# Altium PCB RAM.PcbDoc
Units mm, origin at the board's own origin, x right, y up, seen from the top; angles counter-clockwise.
Board outline 70 x 57.5 mm, 2 copper layers (Top Layer, Bottom Layer), stack 1.671 mm thick; 43 components, 61 nets, 194 pads, 62 vias.
Unrouted connection lines stored in the file: 4.
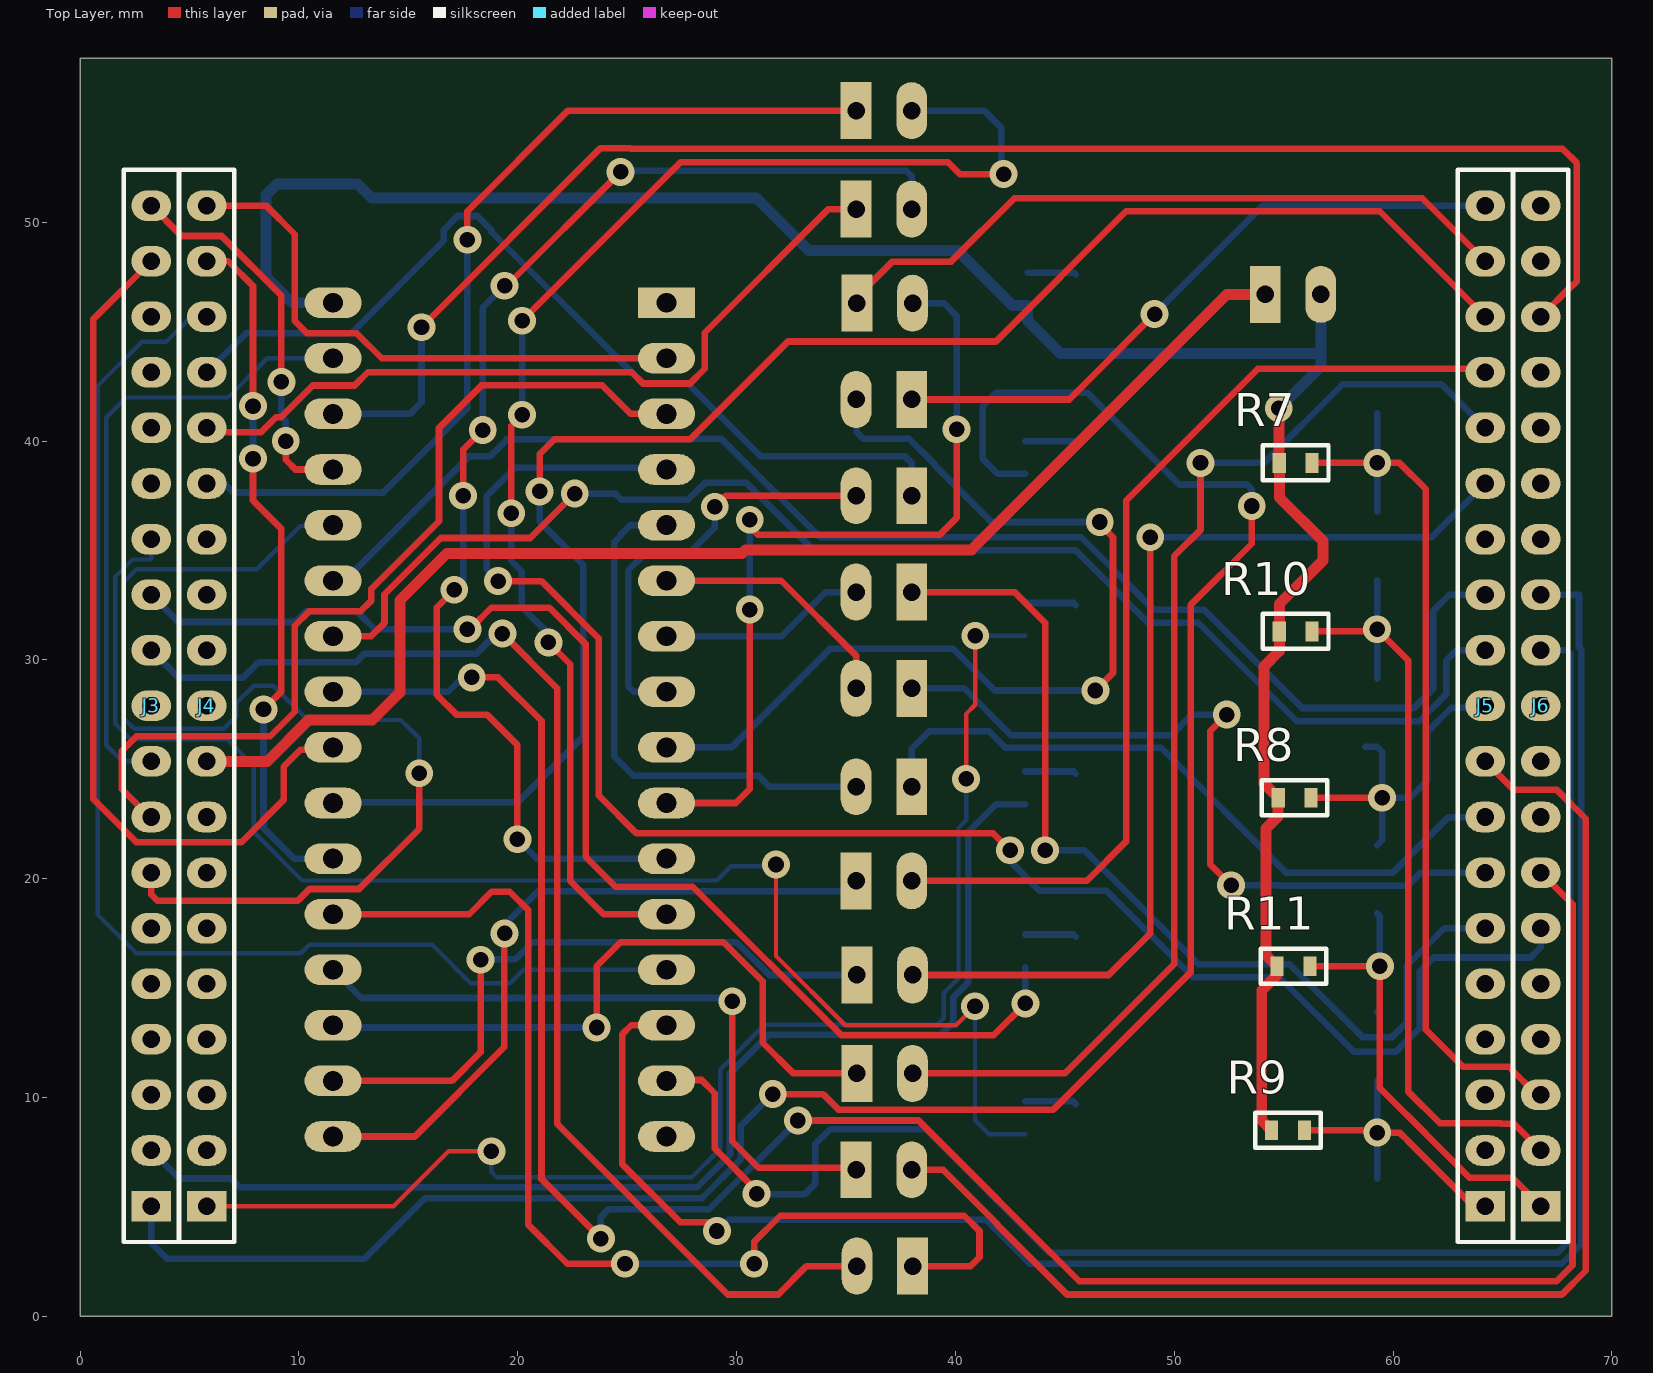
[diagram p0: Top Layer view]
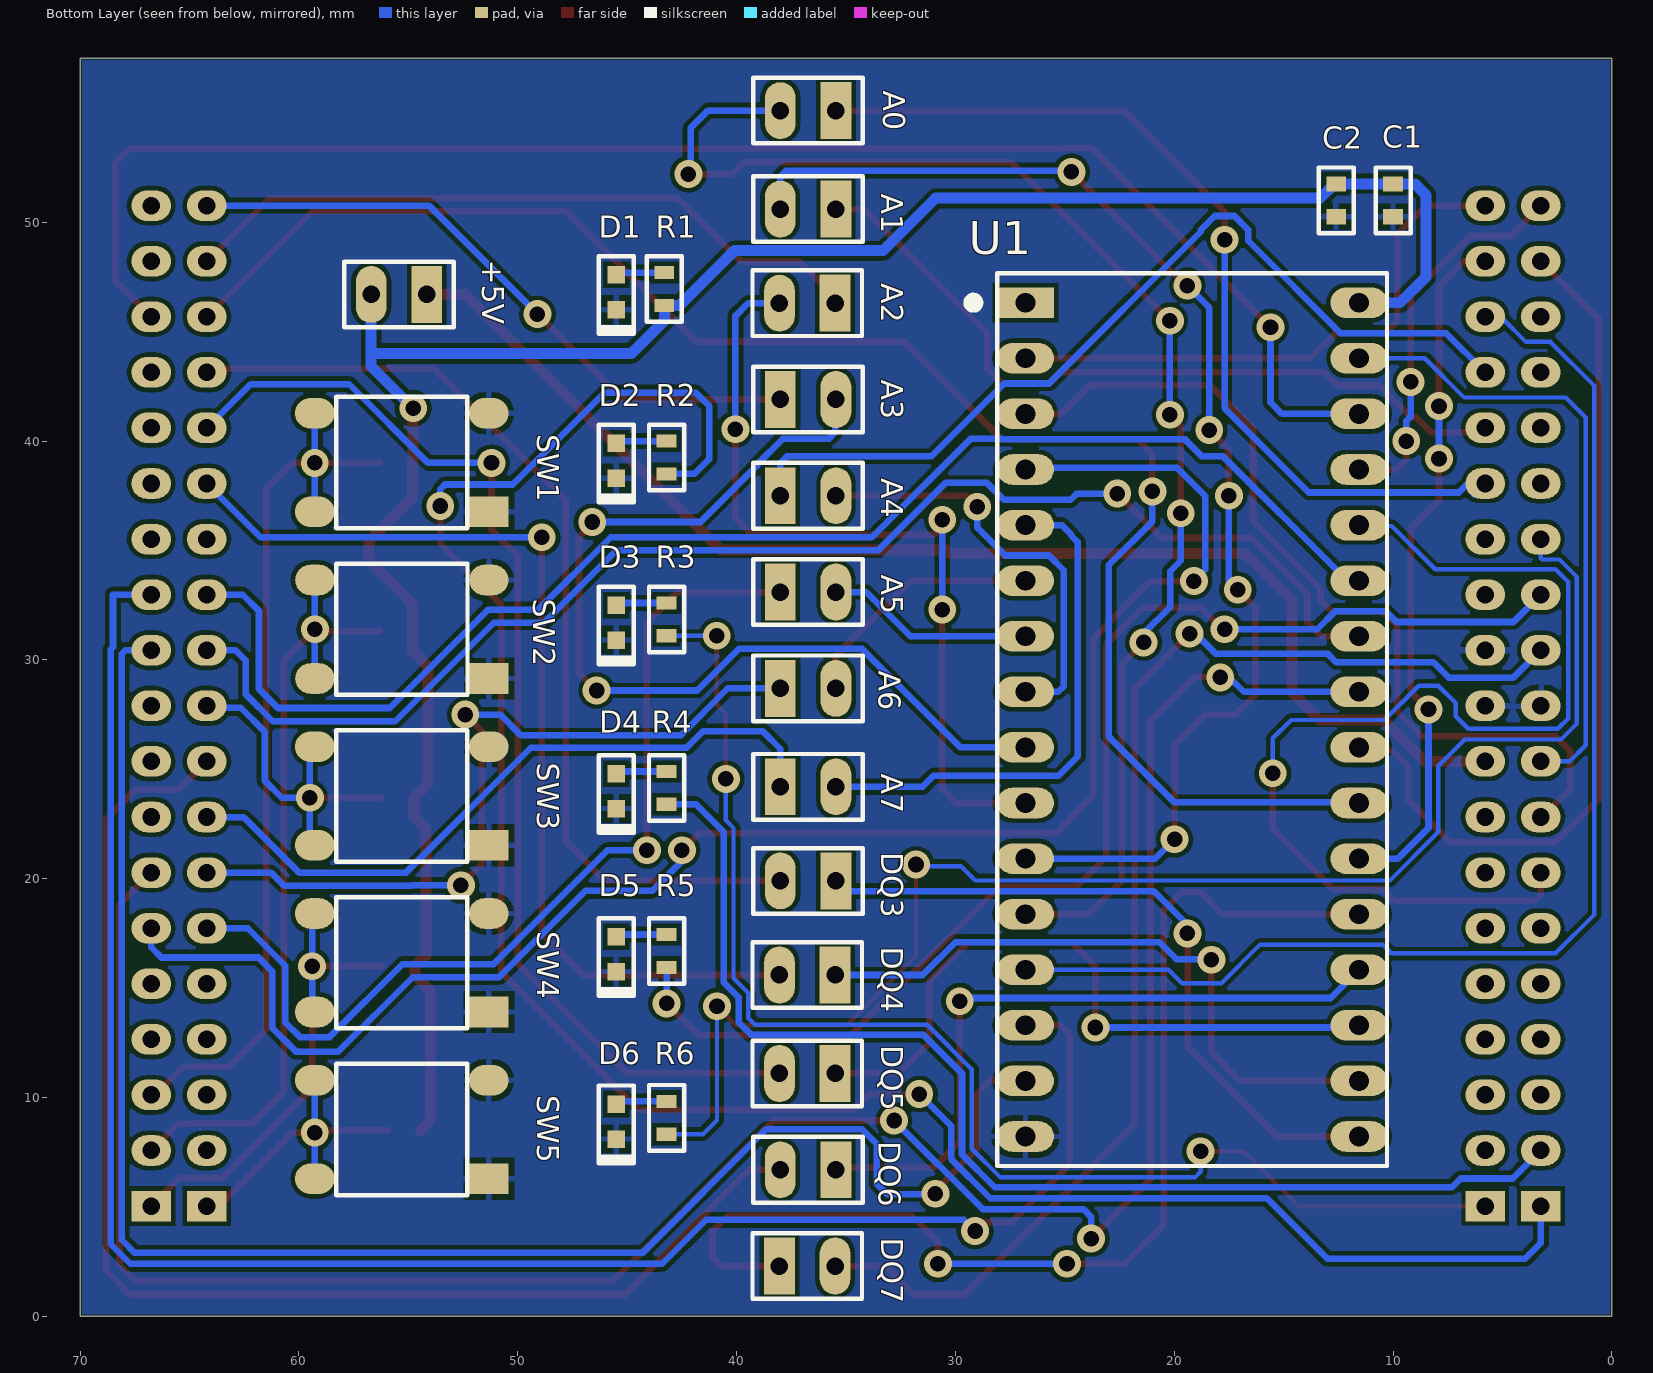
[diagram p1: Bottom Layer view, seen from below]
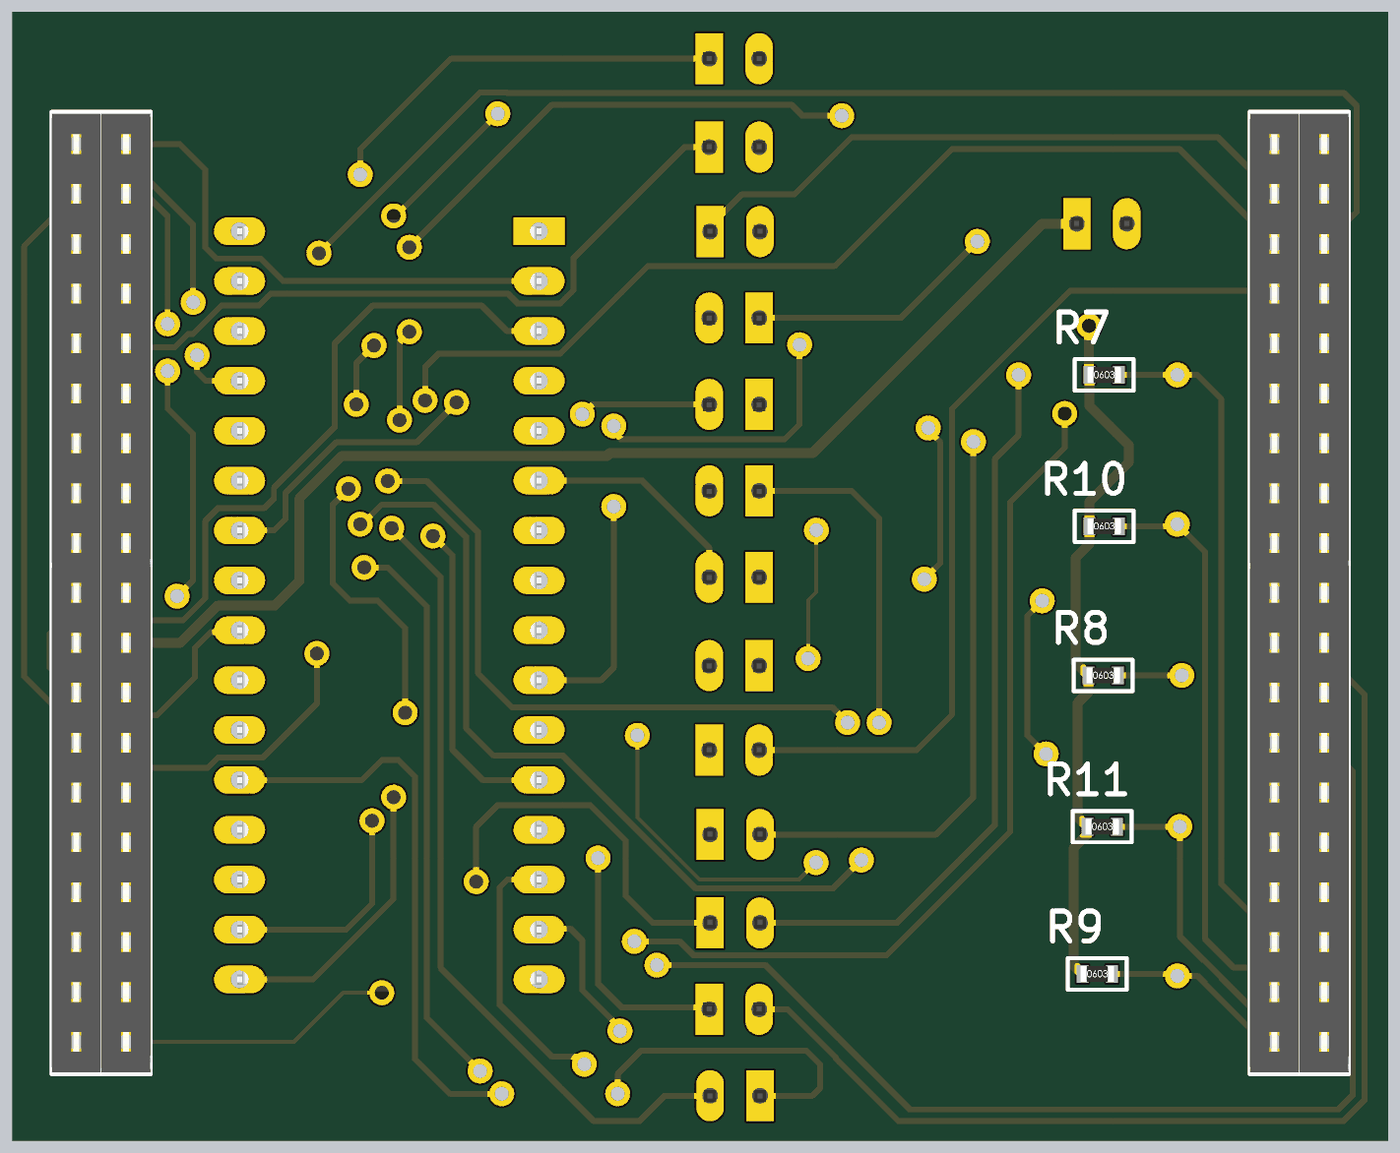
[diagram p2: 3D render of the assembled board from above, using the file's embedded part models]
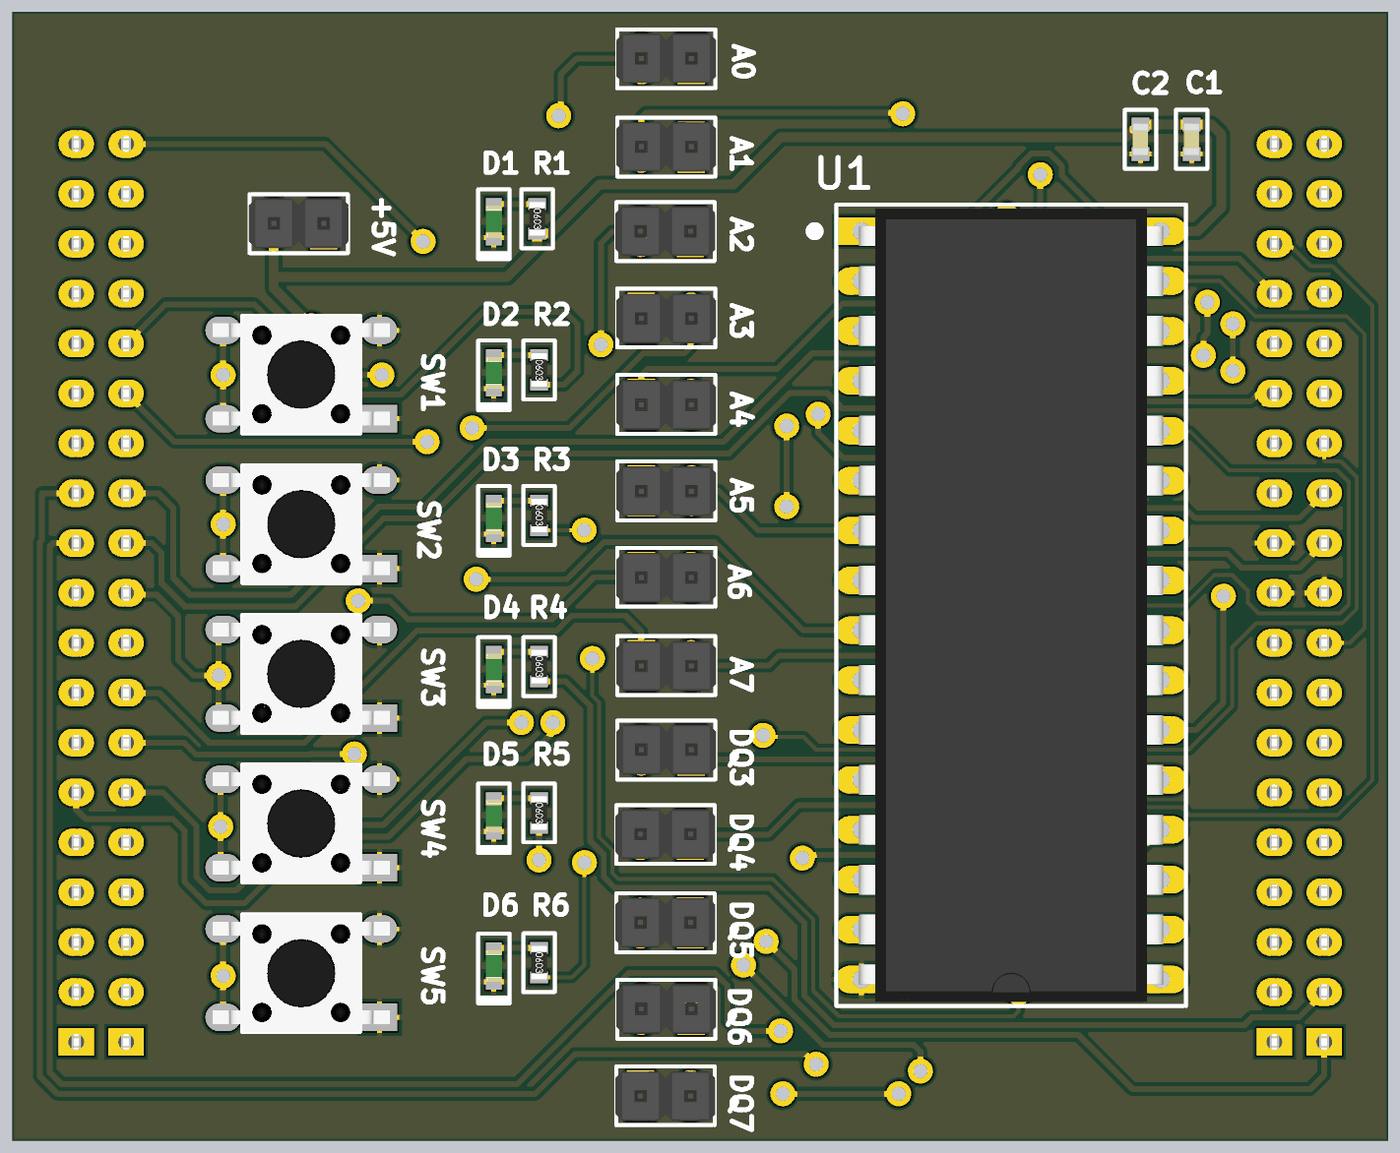
[diagram p3: 3D render of the assembled board from below, using the file's embedded part models]

## Layer stack, top to bottom
Top Solder: solder mask 0.0102, Solder Resist, Dk 3.5
Top Layer: signal copper 0.0356
Dielectric 1: dielectric 1.6, FR-4, Dk 4.8
Bottom Layer: signal copper 0.0356
Bottom Solder: solder mask 0.0102, Solder Resist, Dk 3.5

## Board outline
0,0 70,0 70,57.5 0,57.5

## Design rules (kind name [scope] priority, off if disabled: settings)
Clearance [All] p1: gap=0.2 ignorepadtopadclearanceinfootprint=FALSE
PolygonConnect [All] p1: connectstyle=Relief reliefconductorwidth=0.254 reliefentries=4 polygonreliefangle="90 Angle" airgapwidth=0.254
RoutingVias [All] p1: holewidth=0.3 width=0.6 viastyle="Through Hole" minholewidth=0.3 minwidth=0.6 maxholewidth=0.3 maxwidth=0.6
SolderMaskExpansion [All] p1: expansion=0.102
Width [All] p1: maxlimit=1 minlimit=0.2 preferedwidth=0.2
30 further rules are at their usual default settings.

## Components (designator, comment, footprint, x,y, rotation, side; value= is the part's Value field where it differs from the comment)
+5V "1x2 Goldpin" 1X2_GOLDPIN 54.16,46.7 r270 bottom (schematic designator J1)
A0 "1x2 Goldpin" 1X2_GOLDPIN 35.46,55.1 r270 bottom (schematic designator J18)
A1 "1x2 Goldpin" 1X2_GOLDPIN 35.46,50.6 r270 bottom (schematic designator J16)
A2 "1x2 Goldpin" 1X2_GOLDPIN 35.5,46.3 r270 bottom (schematic designator J14)
A3 "1x2 Goldpin" 1X2_GOLDPIN 38,41.9 r90 bottom (schematic designator J12)
A4 "1x2 Goldpin" 1X2_GOLDPIN 38,37.5 r90 bottom (schematic designator J10)
A5 "1x2 Goldpin" 1X2_GOLDPIN 38,33.1 r90 bottom (schematic designator J8)
A6 "1x2 Goldpin" 1X2_GOLDPIN 38,28.7 r90 bottom (schematic designator J7)
A7 "1x2 Goldpin" 1X2_GOLDPIN 38,24.2 r90 bottom (schematic designator J2)
C1 "100n" CAP_0603 10,51 r90 bottom
C2 "1u" CAP_0603 12.6,51 r270 bottom
D1 "RED LED" LED_SMD_0603 45.5,46.8 r90 bottom
D2 "RED LED" LED_SMD_0603 45.5,39.1 r90 bottom
D3 "RED LED" LED_SMD_0603 45.5,31.7 r90 bottom
D4 "RED LED" LED_SMD_0603 45.5,24 r90 bottom
D5 "RED LED" LED_SMD_0603 45.5,16.55 r90 bottom
D6 "RED LED" LED_SMD_0603 45.5,8.9 r90 bottom
DQ3 "1x2 Goldpin" 1X2_GOLDPIN 35.46,19.9 r270 bottom (schematic designator J17)
DQ4 "1x2 Goldpin" 1X2_GOLDPIN 35.5,15.6 r270 bottom (schematic designator J15)
DQ5 "1x2 Goldpin" 1X2_GOLDPIN 35.5,11.1 r270 bottom (schematic designator J13)
DQ6 "1x2 Goldpin" 1X2_GOLDPIN 35.46,6.7 r270 bottom (schematic designator J11)
DQ7 "1x2 Goldpin" 1X2_GOLDPIN 38.04,2.3 r90 bottom (schematic designator J9)
J3 "1x19 Header" 1X19_FEMALE_CONNECTOR 3.25,5.04 r180 top
J4 "1x19 Header" 1X19_FEMALE_CONNECTOR 5.79,5.04 r180 top
J5 "1x19 Header" 1X19_FEMALE_CONNECTOR 64.21,5.04 r180 top
J6 "1x19 Header" 1X19_FEMALE_CONNECTOR 66.75,5.04 r180 top
R1 "330R" R0603 43.3,46.95 r90 bottom
R2 "330R" R0603 43.2,39.25 r90 bottom
R3 "330R" R0603 43.2,31.85 r90 bottom
R4 "330R" R0603 43.2,24.15 r90 bottom
R5 "330R" R0603 43.2,16.7 r90 bottom
R6 "330R" R0603 43.2,9.075 r90 bottom
R7 "1K" R0603 55.55,39 r180 top
R8 "1K" R0603 55.5,23.7 r180 top
R9 "1K" R0603 55.2,8.5 r180 top
R10 "1K" R0603 55.55,31.3 r180 top
R11 "1K" R0603 55.45,16 r180 top
SW1 "TACT SWITCH" TACT_SWITCH_6X6MM 55.3,39.02 r0 bottom
SW2 "TACT SWITCH" TACT_SWITCH_6X6MM 55.296,31.398 r0 bottom
SW3 "TACT SWITCH" TACT_SWITCH_6X6MM 55.3,23.78 r0 bottom
SW4 "TACT SWITCH" TACT_SWITCH_6X6MM 55.3,16.16 r0 bottom
SW5 "TACT SWITCH" TACT_SWITCH_6X6MM 55.3,8.54 r0 bottom
U1 "SRAM" "DIP_32PIN_15,24MM - DUPLICATE" 26.8,46.32 r180 bottom

## Footprints (in the part's own frame and the unit in brackets; to place one, negate y for a bottom-side part, rotate by r counter-clockwise, add the part's x,y. Pads: shape width x height; smd on the part's side, far side on the other; paste and mask are expansions set on the pad)
1X2_GOLDPIN [mm]
  rect 2.6x1.4 hole 0.8: 1(0,0)
  oval 2.6x1.4 hole 0.8: 2(0,-2.54)
  silkscreen extent -1.5,-3.77 1.5,1.23, body extent -1.29,-3.81 1.25,1.27, height 9.51
1X19_FEMALE_CONNECTOR [mm]
  rect 1.8x1.4 hole 0.8: 1(0,0)
  oval 1.8x1.4 hole 0.8: 2(0,-2.54) 3(0,-5.08) 4(0,-7.62) 5(0,-10.16) 6(0,-12.7) 7(0,-15.24) 8(0,-17.78) 9(0,-20.32) 10(0,-22.86) 11(0,-25.4) 12(0,-27.94) 13(0,-30.48) 14(0,-33.02) 15(0,-35.56) 16(0,-38.1) 17(0,-40.64) 18(0,-43.18) 19(0,-45.72)
  silkscreen extent -1.25,-47.36 1.25,1.64, body extent -1.25,-47.26 1.25,1.54, height 8.31
CAP_0603 [mm]
  rect 0.7x0.9 smd: 1(-0.75,0) 2(0.75,0)
  silkscreen extent -1.5,-0.8 1.5,0.8, body extent -0.8,-0.4 0.8,0.4, height 0.81
"DIP_32PIN_15,24MM - DUPLICATE" [mm]
  rect 2.6x1.4 hole 0.9: 1(0,0)
  oval 2.6x1.4 hole 0.9: 2(0,-2.54) 3(0,-5.08) 4(0,-7.62) 5(0,-10.16) 6(0,-12.7) 7(0,-15.24) 8(0,-17.78) 9(0,-20.32) 10(0,-22.86) 11(0,-25.4) 12(0,-27.94) 13(0,-30.48) 14(0,-33.02) 15(0,-35.56) 16(0,-38.1) 17(15.24,-38.1) 18(15.24,-35.56) 19(15.24,-33.02) 20(15.24,-30.48) 21(15.24,-27.94) 22(15.24,-25.4) 23(15.24,-22.86) 24(15.24,-20.32) 25(15.24,-17.78) 26(15.24,-15.24) 27(15.24,-12.7) 28(15.24,-10.16) 29(15.24,-7.62) 30(15.24,-5.08) 31(15.24,-2.54) 32(15.24,0)
  silkscreen extent -2.58,-39.45 16.52,1.35, body extent -0.12,-39.25 15.37,1.15, height 5
LED_SMD_0603 [mm]
  rect 0.8x0.8 smd: 1(-0.8,0) 2(0.8,0)
  silkscreen extent -1.9,-0.8 1.65,0.8, body extent -0.8,-0.4 0.8,0.4, height 0.4
R0603 [mm]
  rect 0.6x0.9 smd: 1(-0.75,0) 2(0.75,0)
  silkscreen extent -1.5,-0.8 1.5,0.8, body extent -0.85,-0.4 0.85,0.4, height 0.57
TACT_SWITCH_6X6MM [mm]
  rect 1.8x1.4 smd: 1(-3.975,2.25)
  oval 1.8x1.4 smd: 2(3.975,2.25) 3(-3.975,-2.25) 4(3.975,-2.25)
  silkscreen extent -3,-3 3,3, body extent -4.5,-3 4.5,3, height 4.3

## Part data
+5V A0 A1 A2 A3 A4 A5 A6 A7 DQ3 DQ4 DQ5 DQ6 DQ7: library part 77311-818-02LF, "Headers & Wire Housings 2P STR SR TMT HDR .38 AU .45IN LENGTH", Color=Black, Current Rating=3A, Insulation Resistance=5GR, Manufacturer="Amphenol FCI", Max Operating Temperature=125°C, Max Voltage Rating (AC)=1.5kV, Min Operating Temperature=-65°C, Package Quantity=1000, ComponentLink1Description=http://portal.fciconnect.com/Comergent//fci/drawing/77311.pdf?src-supplier=Digi-Key, ComponentLink1URL=http://portal.fciconnect.com/Comergent//fci/drawing/77311.pdf?src-supplier=Digi-Key, ComponentLink2Description=http://portal.fciconnect.com/Comergent/fci/drawing/77311.pdf?src-supplier=Avnet, ComponentLink2URL=http://portal.fciconnect.com/Comergent/fci/drawing/77311.pdf?src-supplier=Avnet, Connector Type="Male Pin", Contact Gender=Male, Contact Material=Bronze, Contact Mating Length=0.23inch, Contact Plating=Gold,GXT, Contact Post Length=3.05mm, Depth=2.4mm, Gender=Male, Housing Color=Black, Housing Material=Thermoplastic, Lead Free="Lead Free", Length=5.08mm, Manufacturer Part Number=77311-818-02LF, Mount="Through Hole", Number of Contacts=2, Number of Positions=2, Number of Rows=1, Orientation=Straight, Packaging=Bulk, Pitch=2.54mm, Pricing 1="1000=0.06214, 2000=0.06064, 4000=0.05929, 6000=0.058, 10000=0.05727 (USD)", Radiation Hardening=No, Stock 1=0, Supplier 1=Avnet, Termination=Solder, Voltage Rating=1.5kV
C1: library part GRM188R71H104KA93D, "CERAMIC CAPACITOR, 0.1UF, 50V, X7R, 10%, 0603, FULL REEL; Product Range:GRM Series; Capacitance:0.1 F; Capacitance Tolerance:  10%; Dielectric Characteristic:X7R; Voltage Rating:50V; Ceramic Capacitor Case:0603 ^1608 Metric]; MSL:-", Capacitance=100nF, Case/Package=0603, Case Code (Metric)=1608, Dielectric=X7R, Dielectric Material=Ceramic, Insulation Resistance=10GR, Manufacturer=Murata, Max Operating Temperature=125°C, Min Operating Temperature=-55°C, Package Quantity=1, Supplier Part Number 1=8820023RL, Tolerance=10%, Voltage=50V, Case Code (Imperial)=0603, Category=Capacitors, ComponentLink1Description=http://www.jameco.com/Jameco/Products/ProdDS/1857604.pdf?src-supplier=Jameco, ComponentLink1URL=http://www.jameco.com/Jameco/Products/ProdDS/1857604.pdf?src-supplier=Jameco, ComponentLink2Description=http://www.farnell.com/datasheets/4360.pdf?src-supplier=Element14, ComponentLink2URL=http://www.farnell.com/datasheets/4360.pdf?src-supplier=Element14, ComponentLink3Description=https://www.murata.com/~/media/webrenewal/support/library/catalog/products/capacitor/mlcc/c02e.ashx?la=en-us&src-supplier=Digi-Key, ComponentLink3URL=https://www.murata.com/~/media/webrenewal/support/library/catalog/products/capacitor/mlcc/c02e.ashx?la=en-us&src-supplier=Digi-Key, ComponentLink4Description=http://www.farnell.com/datasheets/2048072.pdf?src-supplier=Element14, ComponentLink4URL=http://www.farnell.com/datasheets/2048072.pdf?src-supplier=Element14, ComponentLink5Description=https://www.distrelec.biz/Web/Downloads/_t/ds/murata_MLCC_eng_tds.pdf?mime=application%2Fpdf&src-supplier=Distrelec, ComponentLink5URL=https://www.distrelec.biz/Web/Downloads/_t/ds/murata_MLCC_eng_tds.pdf?mime=application%2Fpdf&src-supplier=Distrelec, ComponentLink6Description=https://produktinfo.conrad.com/datenblaetter/450000-474999/451744-da-01-en-VS_KONDENSATOR_0603.pdf?src-supplier=Conrad, ComponentLink6URL=https://produktinfo.conrad.com/datenblaetter/450000-474999/451744-da-01-en-VS_KONDENSATOR_0603.pdf?src-supplier=Conrad, Contact Plating=Tin,Matte, Depth=0.8mm, Height=0.8mm, Lead Free="Lead Free", Length=1.6mm, Manufacturer Part Number=GRM188R71H104KA93D, Material=Ceramic, Mount="Surface Mount", Number of Pins=2, Packaging="Tape and Reel", Radiation Hardening=No, REACH SVHC="No SVHC", Stock 1=0, Supplier 1=Farnell, Termination=SMD/SMT, Thickness=0.035inch, Voltage Rating=50V, Voltage Rating (DC)=50V, Width=0.8mm
C2: library part GRM188R61E105KA12D, "CERAMIC CAPACITOR, 1UF, 25V, X5R, 10%, SMD, FULL REEL; Product Range:GRM Series; Capacitance:1 F; Capacitance Tolerance:  10%; Dielectric Characteristic:X5R; Voltage Rating:25V; Ceramic Capacitor Case:0603 ^1608 Metric]; MSL:-", Capacitance=1uF, Case/Package=0603, Case Code (Metric)=1608, Dielectric=X5R, Manufacturer=Murata, Max Operating Temperature=85°C, Min Operating Temperature=-55°C, Package Quantity=4000, Supplier Part Number 1=1403763, Tolerance=10%, Voltage=25V, Case Code (Imperial)=0603, Catrgory=Capacitors, ComponentLink1Description=http://uk.rs-online.com/webdocs/1423/0900766b81423d08.pdf?src-supplier=RSComponents, ComponentLink1URL=http://uk.rs-online.com/webdocs/1423/0900766b81423d08.pdf?src-supplier=RSComponents, ComponentLink2Description=https://www.murata.com/~/media/webrenewal/support/library/catalog/products/capacitor/mlcc/c02e.ashx?la=en-us&src-supplier=Digi-Key, ComponentLink2URL=https://www.murata.com/~/media/webrenewal/support/library/catalog/products/capacitor/mlcc/c02e.ashx?la=en-us&src-supplier=Digi-Key, ComponentLink3Description=http://www.farnell.com/datasheets/1784406.pdf?src-supplier=Element14, ComponentLink3URL=http://www.farnell.com/datasheets/1784406.pdf?src-supplier=Element14, ComponentLink4Description=http://www.jameco.com/Jameco/Products/ProdDS/1857399.pdf?src-supplier=Jameco, ComponentLink4URL=http://www.jameco.com/Jameco/Products/ProdDS/1857399.pdf?src-supplier=Jameco, ComponentLink5Description=http://www.farnell.com/datasheets/2047765.pdf?src-supplier=Element14, ComponentLink5URL=http://www.farnell.com/datasheets/2047765.pdf?src-supplier=Element14, ComponentLink6Description=http://psearch.murata.com/capacitor/product/GRM188R61C474KA93%23.pdf?src-supplier=Future+Electronics, ComponentLink6URL=http://psearch.murata.com/capacitor/product/GRM188R61C474KA93%23.pdf?src-supplier=Future+Electronics, ComponentLink7Description=https://www.distrelec.biz/Web/Downloads/_t/ds/murata_MLCC_eng_tds.pdf?mime=application%2Fpdf&src-supplier=Distrelec, ComponentLink7URL=https://www.distrelec.biz/Web/Downloads/_t/ds/murata_MLCC_eng_tds.pdf?mime=application%2Fpdf&src-supplier=Distrelec, ComponentLink8Description=http://www.farnell.com/datasheets/608985.pdf?src-supplier=Element14, ComponentLink8URL=http://www.farnell.com/datasheets/608985.pdf?src-supplier=Element14, ComponentLink9Description=http://components.arrow.com/part/dataview/41894231S6753147N2606?src-supplier=Arrow, ComponentLink9URL=http://components.arrow.com/part/dataview/41894231S6753147N2606?src-supplier=Arrow, ComponentLink10Description=http://www.produktinfo.conrad.com/datenblaetter/450000-474999/450696-da-01-de-VS_CHIP_KOND_0603_1_0_UF_10Pr_25_0V_X5R.pdf?src-supplier=Conrad, ComponentLink10URL=http://www.produktinfo.conrad.com/datenblaetter/450000-474999/450696-da-01-de-VS_CHIP_KOND_0603_1_0_UF_10Pr_25_0V_X5R.pdf?src-supplier=Conrad, ComponentLink11Description=http://www.produktinfo.conrad.com/datenblaetter/450000-474999/454470-da-01-en-VS_KONDENSATOR_0603.pdf?src-supplier=Conrad, ComponentLink11URL=http://www.produktinfo.conrad.com/datenblaetter/450000-474999/454470-da-01-en-VS_KONDENSATOR_0603.pdf?src-supplier=Conrad, Depth=0.8mm, Height=0.8mm, Lead Free="Lead Free", Length=1.6mm, Manufacturer Part Number=GRM188R61E105KA12D, Material=Ceramic, Mount="Surface Mount", Number of Pins=2, Packaging="Tape and Reel", Radiation Hardening=No, REACH SVHC="No SVHC", Stock 1=0, Supplier 1=Farnell, Termination=SMD/SMT, Thickness=0.035inch, Voltage Rating=25V, Voltage Rating (DC)=25V, Width=0.031inch
D1 D2 D3 D4 D5 D6: library part SML-D12U8WT86, "LED 0603 Uni-Color Red 2-Pin Chip (1608Metric) T/R", Case/Package=0603, Case Code (Metric)=1608, Color=Red, Forward Current=20mA, Forward Voltage=2.2V, Lens Color=White,Diffused, Manufacturer=Rohm, Max Operating Temperature=85°C, Min Operating Temperature=-40°C, Package Quantity=1, Supplier Part Number 1=2507530RL, Case Code (Imperial)=0603, ComponentLink1Description=http://uk.rs-online.com/webdocs/13d1/0900766b813d1a87.pdf?src-supplier=RSComponents, ComponentLink1URL=http://uk.rs-online.com/webdocs/13d1/0900766b813d1a87.pdf?src-supplier=RSComponents, ComponentLink2Description=https://www.rohm.com/datasheet/SML-D12V8W?src-supplier=Digi-Key, ComponentLink2URL=https://www.rohm.com/datasheet/SML-D12V8W?src-supplier=Digi-Key, ComponentLink3Description=http://rohmfs.rohm.com/en/products/databook/datasheet/opto/led/chip_mono/sml-d1.pdf?src-supplier=Avnet, ComponentLink3URL=http://rohmfs.rohm.com/en/products/databook/datasheet/opto/led/chip_mono/sml-d1.pdf?src-supplier=Avnet, ComponentLink4Description=http://rohmfs.rohm.com/en/products/databook/datasheet/opto/led/chip_mono/sml-d1.pdf?src-supplier=Avnet+Europe, ComponentLink4URL=http://rohmfs.rohm.com/en/products/databook/datasheet/opto/led/chip_mono/sml-d1.pdf?src-supplier=Avnet+Europe, Dominant Wavelength=620nm, Height=0.65mm, Illumination Color=Red, Lead Free="Lead Free", Length=1.6mm, Lens Style=Rectangular,Diffused,Colorless, Lens Transparency=Diffused, Luminous Intensity=63mcd, Manufacturer Part Number=SML-D12U8WT86, Mount="Surface Mount", Number of LEDs=1, Number of Pins=2, Packaging="Tape and Reel", Radiation Hardening=No, REACH SVHC="No SVHC", Stock 1=0, Supplier 1=Farnell, Test Current=20mA, Viewing Angle=160°, Wavelength=620nm, Width=0.8mm
J3 J4 J5 J6: library part 1-535584-7, "Headers & Wire Housings 19 MODIV VRT SR CE 100/115", Color=Black, Contact Current Rating=2A, Contact Resistance=12MR, Flammability Rating="UL94 V-0", High Temperature Compatible=No, Insulation Resistance=5GR, Manufacturer="TE Connectivity AMP", Max Operating Temperature=125°C, Min Operating Temperature=-65°C, Package Quantity=11, Supplier Part Number 1=3163675, Approvals=CSA, Boss="No (Without)", Category=Connectors, ComponentLink1Description=http://www.te.com/commerce/DocumentDelivery/DDEController?Action=srchrtrv&DocNm=535584&DocType=Customer+Drawing&DocLang=English&src-supplier=Digi-Key, ComponentLink1URL=http://www.te.com/commerce/DocumentDelivery/DDEController?Action=srchrtrv&DocNm=535584&DocType=Customer+Drawing&DocLang=English&src-supplier=Digi-Key, ComponentLink2Description=http://www.te.com/commerce/DocumentDelivery/DDEController?Action=srchrtrv&DocNm=1307819_AMPMODU&DocType=DS&DocLang=English&s_cid=1046&src-supplier=Avnet, ComponentLink2URL=http://www.te.com/commerce/DocumentDelivery/DDEController?Action=srchrtrv&DocNm=1307819_AMPMODU&DocType=DS&DocLang=English&s_cid=1046&src-supplier=Avnet, Connector Type=Receptacle,Connector,Socket, Contact Material=Bronze, Contact Plating=Tin,Lead, Contact Post Length=0.125inch, ELV=Non-Compliant, Height=3.56mm, Housing Color=Black, Housing Material=Thermoplastic, Manufacturer Part Number=1-535584-7, Mount="Through Hole", Number of Contacts=19, Number of Positions=19, Number of Rows=1, Orientation=Vertical, Packaging=Rail/Tube, PCB Mounting Orientation=Vertical, PCB Mount Retention=Without, PCB Thickness=2.4mm, Pitch=2.54mm, Plating Thickness=2.54um, Sealable="No (Without)", Stackable=Yes, Stock 1=0, Supplier 1=Farnell, Tail Length=3.18mm, Termination=Solder
R1 R2 R3 R4 R5 R6: library part ERA-3AEB331V, "Resistor, SMD 330 Ohm 0603  ±  0.1 %, ERA3AEB331V, Panasonic Automotive & Industrial Systems", Case/Package=0603, Case Code (Metric)=1608, Manufacturer=Panasonic, Max Operating Temperature=155°C, Max Power Dissipation=100mW, Min Operating Temperature=-55°C, Package Quantity=1, Supplier Part Number 1=1577599RL, Temperature Coefficient=25ppm/°C, Tolerance=0.1%, Voltage Rating=75V, Case Code (Imperial)=0603, Category=Resistors, ComponentLink1Description=http://uk.rs-online.com/webdocs/0fe2/0900766b80fe20f7.pdf?src-supplier=RSComponents, ComponentLink1URL=http://uk.rs-online.com/webdocs/0fe2/0900766b80fe20f7.pdf?src-supplier=RSComponents, ComponentLink2Description=http://www.farnell.com/datasheets/2059650.pdf?src-supplier=Farnell, ComponentLink2URL=http://www.farnell.com/datasheets/2059650.pdf?src-supplier=Farnell, ComponentLink3Description=http://www.farnell.com/datasheets/485442.pdf?src-supplier=Element14, ComponentLink3URL=http://www.farnell.com/datasheets/485442.pdf?src-supplier=Element14, ComponentLink4Description=http://industrial.panasonic.com/www-data/pdf/AOA0000/AOA0000CE26.pdf?src-supplier=Avnet, ComponentLink4URL=http://industrial.panasonic.com/www-data/pdf/AOA0000/AOA0000CE26.pdf?src-supplier=Avnet, ComponentLink5Description=http://industrial.panasonic.com/www-data/pdf/AOA0000/AOA0000CE26.pdf?src-supplier=Avnet+Europe, ComponentLink5URL=http://industrial.panasonic.com/www-data/pdf/AOA0000/AOA0000CE26.pdf?src-supplier=Avnet+Europe, ComponentLink6Description=https://www.distrelec.biz/Web/Downloads/_t/ds/ERA_eng_tds.pdf?mime=application%2Fpdf&src-supplier=Distrelec, ComponentLink6URL=https://www.distrelec.biz/Web/Downloads/_t/ds/ERA_eng_tds.pdf?mime=application%2Fpdf&src-supplier=Distrelec, ComponentLink7Description=http://industrial.panasonic.com/www-data/pdf/AOA0000/AOA0000CE26.pdf?src-supplier=Future+Electronics, ComponentLink7URL=http://industrial.panasonic.com/www-data/pdf/AOA0000/AOA0000CE26.pdf?src-supplier=Future+Electronics, ComponentLink8Description=http://www.mouser.com/ds/2/315/AOA0000C237-1100991.pdf?src-supplier=Mouser, ComponentLink8URL=http://www.mouser.com/ds/2/315/AOA0000C237-1100991.pdf?src-supplier=Mouser, ComponentLink9Description=http://industrial.panasonic.com/cdbs/www-data/pdf/RDM0000/AOA0000C307.pdf?src-supplier=Farnell, ComponentLink9URL=http://industrial.panasonic.com/cdbs/www-data/pdf/RDM0000/AOA0000C307.pdf?src-supplier=Farnell, ComponentLink10Description=https://produktinfo.conrad.com/datenblaetter/450000-474999/450515-da-01-en-WIDERSTAND_0603_ERA.pdf?src-supplier=Conrad, ComponentLink10URL=https://produktinfo.conrad.com/datenblaetter/450000-474999/450515-da-01-en-WIDERSTAND_0603_ERA.pdf?src-supplier=Conrad, Composition="Thin Film,Metal Film", Contact Plating=Tin, Depth=0.8mm, Features="Automotive AEC-Q200", Height=0.45mm, Length=1.6mm, Manufacturer Part Number=ERA-3AEB331V, Military Standard=Not, Mount="Surface Mount", Number of Pins=2, Number of Terminations=2, Packaging="Tape and Reel", Power Rating=100mW, Radiation Hardening=No, REACH SVHC="No SVHC", Resistance=330R, Stock 1=0, Supplier 1=Farnell, Termination=SMD/SMT, Width=0.8mm
R7 R8 R9 R10 R11: library part MC0603SAF1001T5E, "Resistor 0603 SMD, 1KOHM, 100mW, 1% MULTICOMP - MC0603SAF1001T5E - THICK FILM", Case/Package=0603, Case Code (Metric)=1608, Manufacturer=Multicomp, Power Rating=100mW, Resistance=1kR, Supplier Part Number 1=1632391, Temperature Coefficient=100ppm/°C, Tolerance=1%, Voltage Rating=75V, Case Code (Imperial)=0603, Category=Resistors, ComponentLink1Description=http://www.newark.com/pdfs/datasheets/spc/TA-677.pdf?src-supplier=Element14, ComponentLink1URL=http://www.newark.com/pdfs/datasheets/spc/TA-677.pdf?src-supplier=Element14, Composition="Thick Film", Manufacturer Part Number=MC0603SAF1001T5E, Packaging="Cut Tape", REACH SVHC=Unknown, Stock 1=751, Supplier 1=Farnell, Voltage Rating (DC)=75V
SW1 SW2 SW3 SW4 SW5: library part 1571563-7, "Switch Tactile OFF (ON) SPST Round Button Gull Wing 0.05A 12VDC 1VA 0.98N SMD T/R", Case/Package=SMD/SMT, Contact Current Rating=50mA, Manufacturer="TE Connectivity", Max Operating Temperature=85°C, Max Voltage Rating (DC)=12V, Min Operating Temperature=-35°C, Operating Force=0.98N, Package Quantity=750, Supplier Part Number 1=3181155, Voltage Rating (DC)=24V, Actuator Length=0.055inch, Actuator Material=Nylon, Actuator Type=Standard, ComponentLink1Description=http://www.te.com/commerce/DocumentDelivery/DDEController?Action=showdoc&DocId=Customer+Drawing%7F2-1437565-7%7FU2%7Fpdf%7FEnglish%7FENG_CD_2-1437565-7_U2.pdf%7F1571563-9&src-supplier=Avnet, ComponentLink1URL=http://www.te.com/commerce/DocumentDelivery/DDEController?Action=showdoc&DocId=Customer+Drawing%7F2-1437565-7%7FU2%7Fpdf%7FEnglish%7FENG_CD_2-1437565-7_U2.pdf%7F1571563-9&src-supplier=Avnet, Contact Material="Copper Alloy", Contact Plating=Silver, Current Rating=50mA, Depth=5.99mm, ELV=Compliant, Height=5mm, Housing Material=Polyamide, Illumination Type=Non-Illuminated, Length=10.01mm, Manufacturer Part Number=1571563-7, Material=Polyamide, Max Current Rating=50mA, Mount="Surface Mount", Orientation=Straight, Packaging="Loose Piece", Radiation Hardening=No, Stock 1=0, Supplier 1=Farnell, Switch Function=Off-Mom, Termination="Gull Wing", Throw Configuration=SPST, Type=Switch
U1: library part AS6C1008-55PCN, "ALLIANCE MEMORY   AS6C1008-55PCN   SRAM, 1MB, 2.7V-5.5V, 128KX8, PDIP32", Case/Package=PDIP, Manufacturer="Alliance Memory", Max Operating Temperature=70°C, Max Supply Current=60mA, Max Supply Voltage=5.5V, Min Operating Temperature=0°C, Min Supply Voltage=2.7V, Operating Supply Voltage=3V, Package Quantity=13, Supplier Part Number 1=1562896, Access Time=55ns, Address Bus Width=17b, ComponentLink1Description=http://www.alliancememory.com/pdf/AS6C1008%20feb%202007.pdf?src-supplier=Avnet, ComponentLink1URL=http://www.alliancememory.com/pdf/AS6C1008%20feb%202007.pdf?src-supplier=Avnet, ComponentLink2Description=http://www.alliancememory.com/pdf/AS6C1008%20feb%202007.pdf?src-supplier=Digi-Key, ComponentLink2URL=http://www.alliancememory.com/pdf/AS6C1008%20feb%202007.pdf?src-supplier=Digi-Key, ComponentLink3Description=http://www.farnell.com/datasheets/32783.pdf?src-supplier=Element14, ComponentLink3URL=http://www.farnell.com/datasheets/32783.pdf?src-supplier=Element14, ComponentLink4Description=http://www.jameco.com/Jameco/Products/ProdDS/1927457.pdf?src-supplier=Jameco, ComponentLink4URL=http://www.jameco.com/Jameco/Products/ProdDS/1927457.pdf?src-supplier=Jameco, ComponentLink5Description=https://www.alliancememory.com/wp-content/uploads/pdf/AS6C1008%20feb%202007.pdf?src-supplier=Future+Electronics, ComponentLink5URL=https://www.alliancememory.com/wp-content/uploads/pdf/AS6C1008%20feb%202007.pdf?src-supplier=Future+Electronics, Density=1Mb, Height=3.81mm, Interface=Parallel, Lead Free="Lead Free", Length=41.91mm, Manufacturer Part Number=AS6C1008-55PCN, Memory Size=1Mb, Memory Type="SDR,RAM,SRAM - Asynchronous", Mount="Through Hole", Number of Pins=32, Number of Ports=1, Number of Words=128000, Packaging=Rail/Tube, Radiation Hardening=No, REACH SVHC="No SVHC", Stock 1=0, Supplier 1=Farnell, Weight=0.078125oz, Width=13.818mm

## Via types
v1: diameter 1.27, hole 0.711, Top Layer to Bottom Layer, 62 vias

## Nets (pads, with @x,y where several pads share a name; then routed paths per layer and width w, separated by ;. In a path a pad name is that pad's centre, name@x,y a point inside that pad or via, vN(x,y) a via of type N, cw(c..) or ccw(c..) an arc to the next point about the centre after c; other vN are vias at no path point)
+5VDC: +5V.2 C1.2 C2.1 R1.1 R7.2 R8.2 R9.2 R10.2 R11.2 U1.32 | length 101.5
  Top Layer w0.5: R9.2 54,8.95 54,14.9 54.7,15.6 R11.2 54.2,16.5 54.2,22.3 54.75,22.85 R8.2 54.1,24.35 54.1,29.7 54.8,30.4 R10.2 54.8,32.55 56.794,34.544 56.794,35.433 54.8,37.427 R7.2 54.78,39.02 v1(54.78,41.5)
  Bottom Layer w0.5: U1.32 9.68,46.32 8.5,47.5 8.5,51.25 9,51.75 C1.2 C2.1 12.678,51.75 13.328,51.1 30.9,51.1 33.3,48.7 40.1,48.7 42.6,46.2 R1.1 43.3,45.5 44.8,44 56.58,44 56.7,44.12 ; v1(54.78,41.5) 56.7,43.42 56.7,44.12 ; +5V.2 56.7,44.12
GND: C1.1 C2.2 D1.1 D2.1 D3.1 D4.1 D5.1 D6.1 J3.10 J4.10 J4.11 SW1.1 SW1.3 SW2.1 SW2.3 SW3.1 SW3.3 SW4.1 SW4.3 SW5.1 SW5.3 U1.16
NetD1_2: D1.2 R1.2 | length 2.2
  Bottom Layer w0.3: R1.2 45.4,47.7 D1.2
NetD2_2: D2.2 R2.2 | length 2.3
  Bottom Layer w0.3: R2.2 45.4,40 D2.2
NetD3_2: D3.2 R3.2 | length 2.3
  Bottom Layer w0.3: R3.2 45.4,32.6 D3.2
NetD4_2: D4.2 R4.2 | length 2.3
  Bottom Layer w0.3: R4.2 45.4,24.9 D4.2
NetD5_2: D5.2 R5.2 | length 2.3
  Bottom Layer w0.3: R5.2 45.4,17.45 D5.2
NetD6_2: D6.2 R6.2 | length 2.4
  Bottom Layer w0.3: R6.2 45.375,9.825 D6.2
NetJ1_1: +5V.1 J4.9 | length 59.7
  Top Layer w0.5: J4.9 8.552,25.36 10.442,27.25 13.35,27.25 14.61,28.51 14.61,32.71 16.77,34.87 30.251,34.87 30.406,35.025 40.725,35.025 52.4,46.7 +5V.1
NetJ2_2: A7.2 U1.5 | length 24.2
  Bottom Layer w0.3: U1.5 25.14,36.16 24.685,35.705 24.685,35.651 24.4,35.366 24.4,25.6 25.3,24.7 25.672,24.7 25.682,24.71 30.99,24.71 31.5,24.2 A7.2
NetJ7_2: A6.2 U1.6 | length 11.6
  Top Layer w0.3: U1.6 32.04,33.62 35.46,30.2 A6.2
NetJ8_2: A5.2 U1.7 | length 9.5
  Bottom Layer w0.3: U1.7 32.055,31.08 34.075,33.1 A5.2
NetJ9_1: DQ7.1 U1.21 | length 52.3
  Top Layer w0.3: U1.21 17.78,18.38 18.806,19.406 19.634,19.406 20.485,18.555 20.485,4.178 22.263,2.4 v1(24.9,2.4) v1@24.504,2.296 ; v1(30.8,2.4) 30.8,3.4 32,4.6 40.4,4.6 41.1,3.9 41.1,2.7 40.7,2.3 DQ7.1 DQ7.1@38.24,2.1
  Bottom Layer w0.3: v1(24.9,2.4) v1(30.8,2.4)
NetJ10_2: A4.2 U1.8 | length 19.5
  Top Layer w0.3: v1(29,37) 29.5,37.5 A4.2
  Bottom Layer w0.3: U1.8 25.3,28.54 25.05,28.79 25.05,34.096 25.724,34.77 27.72,34.77 29,36.05 v1(29,37)
NetJ11_1: DQ6.1 U1.20 | length 31.4
  Top Layer w0.3: v1(29.8,14.4) 29.8,8 31.015,6.785 35.375,6.785 DQ6.1
  Bottom Layer w0.3: U1.20 12.85,14.55 29.65,14.55 v1(29.8,14.4)
NetJ12_2: A3.2 U1.9 | length 44.9
  Top Layer w0.3: v1(46.4,28.6) 47.2,29.4 47.2,35.6 46.6,36.2 v1(46.6,36.3)
  Bottom Layer w0.3: U1.9 29.77,26 34.27,30.5 39.9,30.5 41.8,28.6 v1(46.4,28.6) ; A3.2 35.5,41.86 35.5,40.4 35.8,40.1 37.895,40.1 39.05,38.945 39.05,38.903 41.653,36.3 v1(46.6,36.3)
NetJ13_1: DQ5.1 U1.19 | length 31.4
  Top Layer w0.3: v1(23.6,13.2) 23.6,16 24.7,17.1 29.4,17.1 31.195,15.305 31.195,12.505 32.6,11.1 DQ5.1
  Bottom Layer w0.3: U1.19 11.66,13.2 v1(23.6,13.2)
NetJ14_2: A2.2 U1.10 | length 38.1
  Top Layer w0.3: U1.10 29.96,23.46 30.6,24.1 v1(30.6,32.3) ; v1(30.6,36.4) 30.6,36.1 30.975,35.725 39.294,35.725 40.056,36.487 v1(40.056,40.538)
  Bottom Layer w0.3: v1(30.6,32.3) v1(30.6,36.4) ; A2.2 39.476,46.3 40.056,45.72 v1(40.056,40.538)
NetJ15_1: DQ4.1 U1.18 | length 29.7
  Top Layer w0.3: U1.18 16.991,10.76 18.3,12.069 v1(18.3,16.3)
  Bottom Layer w0.3: v1(18.3,16.3) 18.315,16.315 19.891,16.315 20.676,17.1 30,17.1 31.5,15.6 DQ4.1
NetJ16_2: A1.2 U1.11 | length 59.2
  Top Layer w0.3: v1(17.1,33.2) 16.3,32.4 16.3,28.4 17.2,27.5 18.6,27.5 19.985,26.115 v1(19.985,21.8) ; v1(17.5,37.5) 17.5,39.6 v1(18.4,40.5) ; v1(19.4,47.1) 19.5,47.1 v1(24.7,52.3) v1@24.6,52.3
  Bottom Layer w0.3: v1(17.1,33.2) 17.5,33.6 v1(17.5,37.5) ; v1(18.4,40.5) 18.4,46.1 v1(19.4,47.1) ; v1@20.456,21.644 20.215,21.885 19.985,21.885 v1(19.985,21.8) 20.865,20.92 U1.11 ; v1(24.7,52.3) 24.75,52.35 37.75,52.35 38,52.1 A1.2
NetJ17_1: DQ3.1 U1.17 | length 32.6
  Top Layer w0.3: U1.17 15.3,8.22 19.385,12.305 19.385,17.485 v1(19.4,17.5) 19.4,17.6 v1@19.485,17.685
  Bottom Layer w0.3: v1(19.4,17.5) 19.4,17.7 19.5,17.8 19.4,17.9 20.931,19.431 35.46,19.431 DQ3.1
NetJ18_2: A0.2 U1.12 | length 63.2
  Top Layer w0.3: v1(19.7,36.7) 19.7,40.7 v1(20.2,41.2) ; v1(20.2,45.5) 27.45,52.75 39.65,52.75 40.2,52.2 v1(42.2,52.2) ; v1(21.399,30.799) 22.4,29.798 22.4,19.9 23.92,18.38 U1.12
  Bottom Layer w0.3: v1(19.7,36.7) 19.7,34.534 20.185,34.049 20.185,32.415 21.399,31.201 v1(21.399,30.799) ; v1(20.2,41.2) v1(20.2,45.5) ; A0.2 41.3,55.1 42.1,54.3 v1@42.1,52.7
PA0: A0.1 J4.14 | length 43.1
  Top Layer w0.3: v1(17.7,49.2) 17.7,50.5 22.3,55.1 A0.1
  Bottom Layer w0.3: J4.14@6.3,37.55 J4.14 6.59,38.06 7,37.65 13.85,37.65 17.7,41.5 v1(17.7,49.2)
PA1: A1.1 J4.15 | length 35.4
  Top Layer w0.3: J4.15 5.99,40.4 8.266,40.4 8.951,41.085 9.185,41.085 9.81,41.71 9.81,41.716 10.633,42.54 12.546,42.54 13.146,43.14 25.214,43.14 25.724,42.63 27.876,42.63 28.55,43.304 28.55,44.95 34.2,50.6 A1.1
PA2: A2.1 J5.18 | length 32.1
  Top Layer w0.3: A2.1 35.5,46.58 37.12,48.2 39.8,48.2 42.7,51.1 61.33,51.1 J5.18
PA3: A3.1 J5.19 | length 29.9
  Top Layer w0.3: A3.1 45.2,41.9 v1(49.1,45.8)
  Bottom Layer w0.3: v1(49.1,45.8) 54.06,50.76 J5.19
PA4: A4.1 J4.16 | length 41.7
  Bottom Layer w0.3: J4.16 7.58,44.93 12.396,44.93 16.615,49.149 16.615,49.649 17.251,50.285 18.149,50.285 18.785,49.649 18.785,49.569 25.724,42.63 27.77,42.63 31.1,39.3 37.7,39.3 38,39 A4.1
PA5: A5.1 J5.6 | length 44.3
  Top Layer w0.3: A5.1 42.7,33.1 44.1,31.7 v1(44.1,21.3)
  Bottom Layer w0.3: v1(44.1,21.3) 45.9,21.3 51.1,16.1 55.259,16.1 58.599,12.76 59.951,12.76 60.625,13.434 60.625,16.025 62.34,17.74 J5.6
PA6: A6.1 J5.7 | length 36.1
  Top Layer w0.3: v1(52.4,27.5) 51.638,26.738 51.638,20.662 v1(52.6,19.7)
  Bottom Layer w0.3: A6.1 40.4,28.7 42.55,26.55 49.85,26.55 50.8,27.5 v1(52.4,27.5) ; v1(52.6,19.7) 54.839,19.7 54.859,19.68 60.68,19.68 61.28,20.28 J5.7
PA7: A7.1 J5.8 | length 32
  Bottom Layer w0.3: A7.1 38,25.935 38.811,26.746 41.526,26.746 42.288,25.984 49.403,25.984 55.107,20.28 59.993,20.28 62.513,22.8 64.19,22.8 J5.8
PA8: J5.12 U1.27 | length 64.7
  Bottom Layer w0.3: U1.27 11.97,34.03 12.496,34.03 17.766,39.3 18.734,39.3 19.485,40.051 19.485,40.09 27.876,40.09 27.886,40.1 29.315,40.1 33.815,35.6 45.749,35.6 49.049,32.3 51.349,32.3 55.849,27.8 60.951,27.8 61.824,28.672 61.824,32.233 62.571,32.98 J5.12
PA9: J5.11 U1.26 | length 63.7
  Top Layer w0.3: U1.26 13.3,31.08 13.91,31.69 13.91,33 16.48,35.57 20.57,35.57 v1(22.6,37.6)
  Bottom Layer w0.3: v1@22.7,37.5 v1(22.6,37.6) 24.443,37.6 24.73,37.313 27.778,37.313 28.551,38.085 30.449,38.085 33.534,35 45.5,35 48.8,31.7 51.1,31.7 55.6,27.2 61.2,27.2 62.424,28.424 62.424,29.962 62.901,30.44 J5.11 J5.11@64.21,30.21
PA10: J5.17 U1.23 | length 76.4
  Top Layer w0.3: v1@20.8,37.7 v1(21,37.7) 21,39.4 21.69,40.09 27.89,40.09 32.35,44.55 41.85,44.55 47.8,50.5 59.39,50.5 J5.17
  Bottom Layer w0.3: U1.23 11.585,23.485 19.985,23.485 23,26.5 23,34.326 21,36.326 v1(21,37.7)
PA11: J6.7 U1.25 | length 104.5
  Top Layer w0.3: v1(17.9,29.2) 19.1,29.2 21.085,27.215 21.085,6.271 v1(23.8,3.556) ; v1(32.8,8.95) 38.313,8.95 45.663,1.6 67.469,1.6 68.2,2.331 68.2,18.83 J6.7
  Bottom Layer w0.3: U1.25 16.824,28.54 17.484,29.2 v1(17.9,29.2) ; v1(23.8,3.556) 23.8,4.547 24.153,4.9 28.75,4.9 v1(32.8,8.95)
PA12: J6.6 U1.4 | length 78.6
  Top Layer w0.3: v1(19.1,33.6) 21.08,33.6 23.7,30.98 23.7,23.8 25.43,22.07 41.73,22.07 v1(42.5,21.3)
  Bottom Layer w0.3: v1(19.1,33.6) 18.585,34.115 18.585,37.485 19.885,38.785 26.715,38.785 U1.4 ; v1(42.5,21.3) 42.5,21 42.4,20.9 43.849,19.451 46.9,19.451 50.851,15.5 54.8,15.5 58.2,12.1 60.14,12.1 61.225,13.185 61.225,15.775 61.85,16.4 66.286,16.4 66.75,16.864 J6.6 J6.6@66.54,17.74
PA13: J3.7 U1.28 | length 51.6
  Top Layer w0.3: J3.7 3.25,19.272 3.523,18.999 9.953,18.999 10.484,19.53 12.748,19.53 15.494,22.276 v1(15.494,24.816)
  Bottom Layer w0.2: U1.28 11.519,36.119 10.058,36.119 8.077,34.138 2.581,34.138 2,33.556 2,27.324 2.474,26.85 6.566,26.85 7.14,27.424 7.14,28.029 7.933,28.822 8.831,28.822 10.399,27.254 14.656,27.254 15.494,26.416 v1(15.494,24.816)
PA14: J3.8 U1.3 | length 41.1
  Top Layer w0.3: J3.8 3.18,22.82 1.9,24.1 1.9,25.836 2.574,26.51 8.69,26.51 9.81,27.63 9.81,31.556 10.484,32.23 12.83,32.23 13.31,32.71 13.31,33.248 16.4,36.338 16.4,40.6 18.34,42.54 23.86,42.54 25.16,41.24 U1.3
PA15: J3.9 U1.31 | length 28.8
  Bottom Layer w0.2: J3.9 1.94,25.36 1.2,26.1 1.2,41.078 2.112,41.99 6.756,41.99 8.551,43.785 11.555,43.785 U1.31
PB0: J4.17 U1.13 | length 58.3
  Bottom Layer w0.2: J4.17 5.076,45.68 3.926,44.53 2.814,44.53 0.8,42.516 0.8,18.364 2.574,16.59 10.084,16.59 10.484,16.99 16.076,16.99 17.851,15.215 19.639,15.215 20.264,15.84 U1.13
PB1: J6.12 U1.14 | length 86.1
  Top Layer w0.3: U1.14 25.185,13.3 24.785,12.9 24.785,6.946 27.431,4.3 28.7,4.3 v1(29.1,3.9)
  Bottom Layer w0.3: v1(29.1,3.9) 29.615,4.415 41.385,4.415 43.4,2.4 67.707,2.4 68.6,3.293 68.6,30.481 68.497,30.585 68.497,32.98 J6.12
PB2: J6.11 U1.15 | length 78.1
  Top Layer w0.3: U1.15 26.84,10.8 28.4,10.8 29,10.2 29,7.669 30.913,5.756 v1(30.913,5.6)
  Bottom Layer w0.3: v1(30.913,5.6) 30.925,5.588 33.122,5.588 33.604,6.071 33.604,7.884 34.27,8.55 38.65,8.55 44.3,2.9 67.5,2.9 68.1,3.5 68.1,30.274 67.934,30.44 J6.11
PB3: DQ3.2 J5.16 | length 45.1
  Top Layer w0.3: DQ3.2 46,19.9 47.8,21.7 47.8,37.276 53.824,43.3 64.05,43.3 J5.16
PB4: DQ4.2 J5.14 | length 46.1
  Top Layer w0.3: DQ4.2 47,15.6 48.9,17.5 v1(48.9,35.6)
  Bottom Layer w0.3: v1(48.9,35.6) 61.75,35.6 J5.14
PB5: DQ5.2 J5.15 | length 53.2
  Top Layer w0.3: DQ5.2 45,11.1 50,16.1 50,34.741 51.2,35.941 v1(51.2,39) v1@50.8,39
  Bottom Layer w0.3: v1(51.2,39) 54.1,39 57.7,42.6 62.21,42.6 J5.15
PB6: DQ6.2 J5.9 | length 60
  Top Layer w0.3: DQ6.2 39.431,6.7 41.9,4.231 41.9,4.2 45.1,1 67.717,1 68.8,2.083 68.8,22.738 67.468,24.07 65.5,24.07 J5.9
PB7: DQ7.2 J3.11 | length 58.3
  Top Layer w0.3: v1(19.3,31.2) 21.8,28.7 21.8,8.8 29.6,1 31.9,1 33.2,2.3 DQ7.2
  Bottom Layer w0.3: J3.11 4.5,29.19 7.452,29.19 8.158,29.896 12.602,29.896 12.991,30.285 18.119,30.285 19.034,31.2 v1(19.3,31.2)
PC0: J4.19 U1.2 | length 26.2
  Top Layer w0.3: J4.19 8.5,50.76 9.81,49.45 9.81,45.49 10.37,44.93 12.636,44.93 13.786,43.78 U1.2
PC1: J4.18 U1.22 | length 32
  Top Layer w0.3: J4.18 6.768,48.22 7.9,47.088 v1(7.9,41.6) ; v1(7.9,39.2) 7.9,37.287 9.2,35.987 9.2,28.555 v1(8.382,27.737)
  Bottom Layer w0.3: v1(7.9,39.2) v1(7.9,41.6) ; v1(8.382,27.737) 8.382,22.318 9.78,20.92 U1.22
PC2: J3.18 U1.24 | length 40.1
  Top Layer w0.3: J3.18 0.61,45.58 0.61,23.634 2.574,21.67 7.37,21.67 9.3,23.6 9.3,25.118 10.082,25.9 11.46,25.9 U1.24
PC3: J3.19 U1.29 | length 17.6
  Top Layer w0.3: J3.19 4.64,49.37 6.466,49.37 9.2,46.636 v1(9.2,42.7) ; v1(9.4,40) 9.4,39.141 9.841,38.7 U1.29
  Bottom Layer w0.3: v1(9.2,42.7) 9.2,41.117 9.4,40.917 v1(9.4,40)
PC4: J6.17 U1.30 | length 71.9
  Top Layer w0.3: v1(15.6,45.2) 23.785,53.385 25.149,53.385 25.184,53.35 67.75,53.35 68.4,52.7 68.4,47.3 68.23,47.13 68.2,47.13 J6.17
  Bottom Layer w0.3: U1.30 15.07,41.24 15.6,41.77 v1(15.6,45.2)
PC5: J6.3 R7.1 SW1.2 SW1.4 | length 41.4
  Top Layer w0.3: R7.1 v1(59.275,39) 60.3,39 61.5,37.8 61.5,13.1 63.19,11.41 65.29,11.41 66.58,10.12 J6.3
  Bottom Layer w0.3: SW1.2 v1(59.275,39) SW1.4
PC6: J6.2 R10.1 SW2.2 SW2.4 | length 36.4
  Top Layer w0.3: R10.1 59.173,31.3 v1(59.271,31.398) 60.685,29.984 60.685,10.278 62.133,8.83 64.928,8.83 64.958,8.8 65.53,8.8 J6.2
  Bottom Layer w0.3: SW2.2 v1(59.271,31.398) SW2.4
PC7: J5.10 R8.1 SW3.2 SW3.4 | length 16.7
  Top Layer w0.3: R8.1 v1(59.5,23.7)
  Bottom Layer w0.3: SW3.4@58.73,26.03 SW3.4 59.5,25.805 v1(59.5,23.7) ; SW3.2 59.5,21.755 v1(59.5,23.7) ; J5.10@63.7,27.9 J5.10 64.123,27.813 62.662,27.813 61.57,26.721 61.57,24.487 60.782,23.7 v1(59.5,23.7)
PC8: J6.1 R11.1 SW4.2 SW4.4 | length 23
  Top Layer w0.3: R11.1 v1(59.4,16) 59.4,10.422 60.622,9.2 60.631,9.2 61.5,8.331 61.5,8.322 63.492,6.33 65.46,6.33 J6.1
  Bottom Layer w0.3: SW4.2 59.4,14.035 v1(59.4,16) 59.4,18.285 SW4.4
PC9: J5.1 R9.1 SW5.2 SW5.4 | length 14.2
  Top Layer w0.3: R9.1 59.175,8.5 v1(59.275,8.4) 60.3,8.4 60.7,8 60.7,7.991 63.651,5.04 J5.1
  Bottom Layer w0.3: SW5.2 v1(59.275,8.4) SW5.4
PC10: J3.1 R2.1 | length 98.6
  Top Layer w0.3: v1(31.648,10.16) 33.945,10.16 34.655,9.45 44.477,9.45 50.762,15.735 50.762,32.525 53.543,35.306 v1(53.543,37.033)
  Bottom Layer w0.3: J3.1 3.25,3.354 3.962,2.642 13.005,2.642 15.763,5.4 28.407,5.4 30.2,7.193 30.2,8.712 v1(31.648,10.16) ; R2.1 41.935,38.5 41.243,39.192 41.243,41.586 41.872,42.215 46.025,42.215 50.225,38.015 53.323,38.015 53.543,37.795 v1(53.543,37.033)
PC11: J4.1 R3.1 | length 61.3
  Top Layer w0.2: J4.1 14.336,5.04 16.84,7.544 v1(18.796,7.544) ; v1(40.488,24.562) 40.488,27.529 40.909,27.95 v1(40.909,31.1)
  Bottom Layer w0.2: v1(18.796,7.544) 18.796,6.604 19.05,6.35 27.94,6.35 29.25,7.66 29.25,11.286 31.291,13.328 39.158,13.328 39.459,13.629 39.459,14.768 40.139,15.448 40.139,22.319 40.488,22.667 v1(40.488,24.562) ; v1(40.909,31.1) R3.1
PC12: J3.2 R4.1 | length 54.8
  Bottom Layer w0.3: J3.2 4.53,6.3 6.908,6.3 7.308,5.9 28.2,5.9 29.7,7.4 29.7,11.1 31.478,12.878 39.345,12.878 39.909,13.442 39.909,14.581 40.589,15.261 40.589,22.133 41.857,23.4 R4.1
PC13: J3.12 R5.1 | length 57.8
  Top Layer w0.3: v1(17.7,31.4) 17.7,31.71 17.855,31.555 17.905,31.505 18.785,32.385 21.446,32.385 23.1,30.731 23.1,21 24.47,19.63 28.001,19.63 34.779,12.852 41.752,12.852 v1(43.2,14.3)
  Bottom Layer w0.3: J3.12 4.5,31.73 9.842,31.73 10.342,32.23 12.636,32.23 13.466,31.4 v1(17.7,31.4) ; v1(43.2,14.3) R5.1
PC14: J3.13 R6.1 | length 67.6
  Top Layer w0.2: v1(31.801,20.65) 31.801,16.467 34.965,13.302 40.023,13.302 v1(40.894,14.173)
  Bottom Layer w0.2: J3.13 3.25,34.644 3.193,34.588 2.395,34.588 1.6,33.793 1.6,27.087 2.327,26.36 6.723,26.36 7.932,25.151 7.932,22.132 10.144,19.92 29.089,19.92 29.743,20.574 31.801,20.574 v1(31.801,20.65) ; v1(40.894,14.173) 40.894,8.966 41.535,8.325 R6.1
pads on no net: J3.3 J3.4 J3.5 J3.6 J3.14 J3.15 J3.16 J3.17 J4.2 J4.3 J4.4 J4.5 J4.6 J4.7 J4.8 J4.12 J4.13 J5.2 J5.3 J5.4 J5.5 J5.13 J6.4 J6.5 J6.8 J6.9 J6.10 J6.13 J6.14 J6.15 J6.16 J6.18 J6.19 U1.1

## Polygon pours and split planes (outlines as drawn)
no net on Top Layer (solid, pour order 0): 5.79,27.9
GND on Bottom Layer (solid, pour order 12): 0.1,0.1 69.9,0.1 69.9,57.4 0.1,57.4
no net on Bottom Layer (solid, pour order 6): 3.9,55.5